# Altium PCB Interface-bottom.PcbDoc
Units mm, origin at the board's own origin, x right, y up, seen from the top; angles counter-clockwise.
Board outline 23.9 x 83.5 mm, 2 copper layers (Top Layer, Bottom Layer), stack 1.57 mm thick; 29 components, 36 nets, 131 pads, 33 vias.
Unrouted connection lines stored in the file: 27.
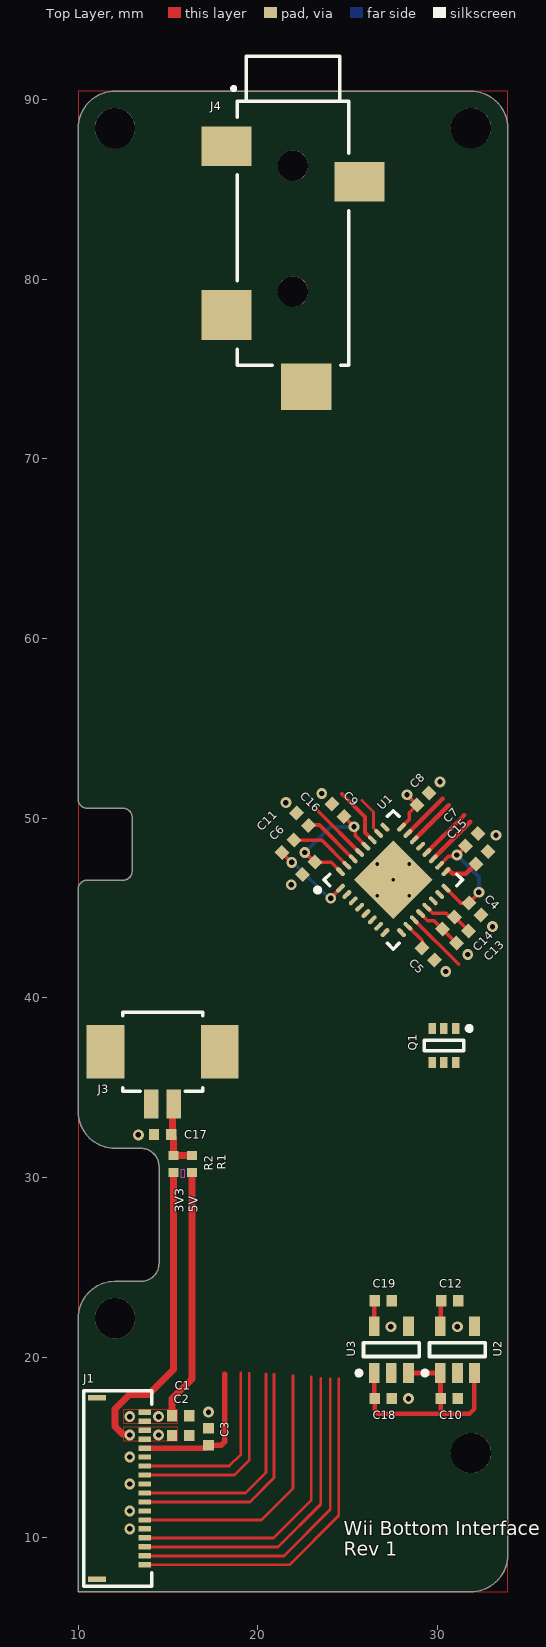
[diagram p0: Top Layer view]
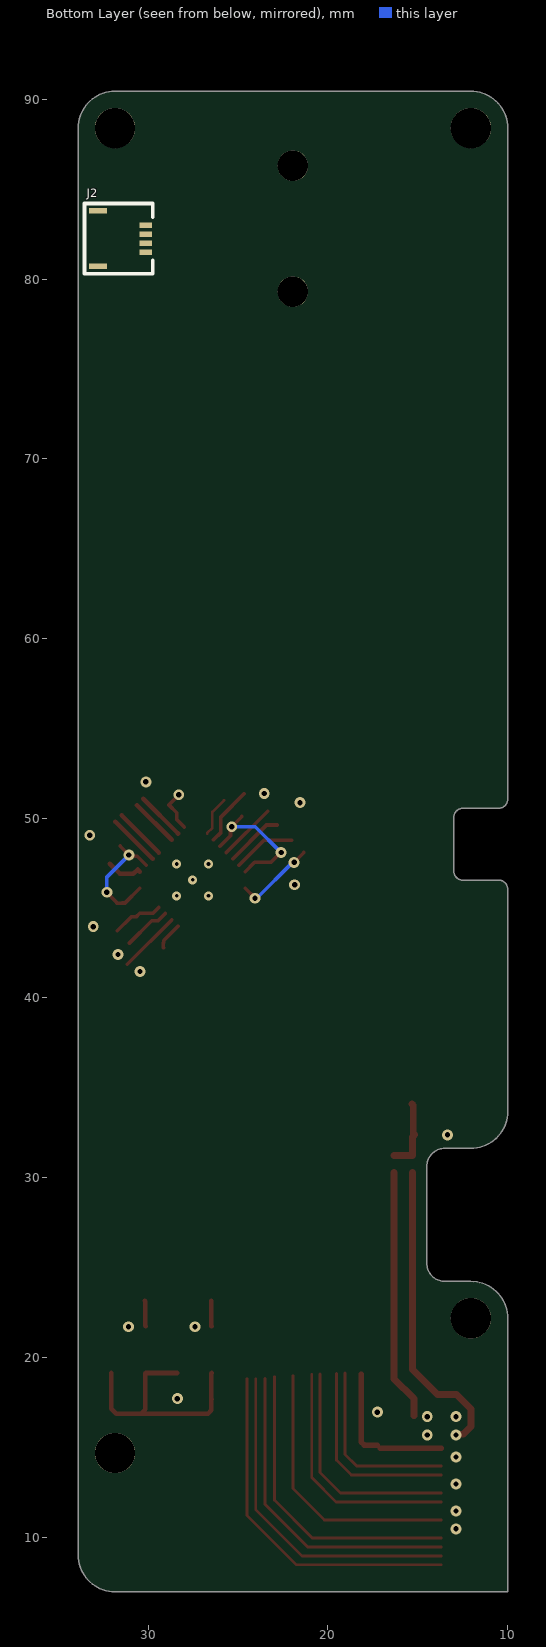
[diagram p1: Bottom Layer view, seen from below]
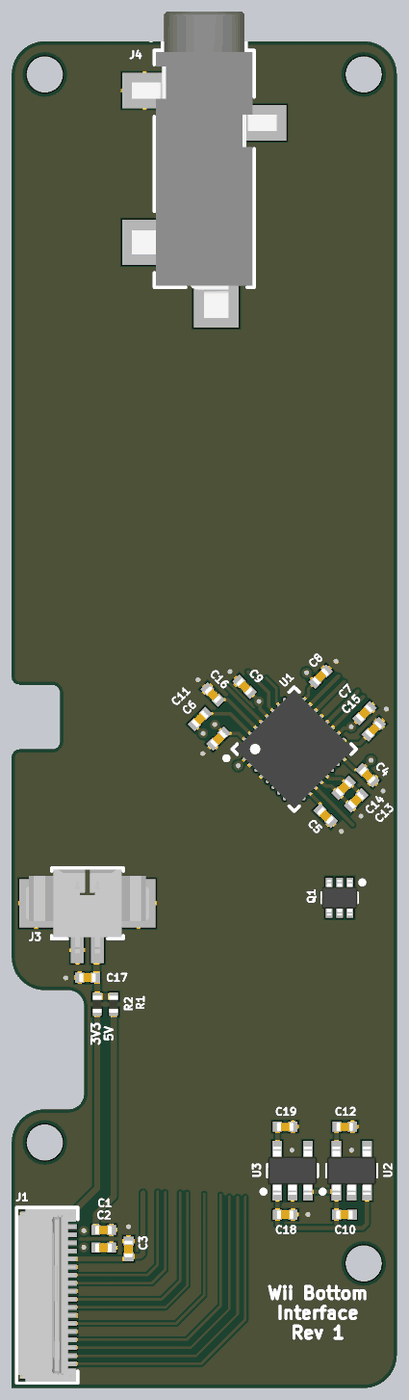
[diagram p2: 3D render of the assembled board from above, using the file's embedded part models]

## Layer stack, top to bottom
Top Solder: solder mask 0.0127, Solder Resist, Dk 3.8
Top Layer: signal copper 0.035
Dielectric: core 1.5, FR-4, Dk 4.5
Bottom Layer: signal copper 0.035
Bottom Solder: solder mask 0.0127, Solder Resist, Dk 3.8

## Board outline
10,6.95 10,22.175 cw(c12.05,22.175) 12.05,24.225 13.5,24.225 ccw(c13.5,25.225) 14.5,25.225 14.5,30.625 ccw(c13.5,30.625) 13.5,31.625 12.05,31.625 cw(c12.05,33.675) 10,33.675 10,46.05 cw(c10.5,46.05) 10.5,46.55 12.5,46.55 ccw(c12.5,47.05) 13,47.05 13,50.05 ccw(c12.5,50.05) 12.5,50.55 10.5,50.55 cw(c10.5,51.05) 10,51.05 10,88.4 cw(c12.05,88.4) 12.05,90.45 31.85,90.45 cw(c31.85,88.4) 33.9,88.4 33.9,9 cw(c31.85,9) 31.85,6.95

## Design rules (kind name [scope] priority, off if disabled: settings)
BoardOutlineClearance [All] p1: gap=0.2 ignorepadtopadclearanceinfootprint=FALSE
Clearance [All] p1: gap=0.127 ignorepadtopadclearanceinfootprint=FALSE except(0.25: Arc-Hole Track-Hole SMDPad-Hole THPad-Hole Via-Hole Fill-Hole Poly-Hole Region-Hole Text-Hole)
ComponentClearance [All] p1: gap=0.127 collisioncheckmode=3 verticalgap=0.127 showdistances=TRUE
DiffPairsRouting [All] p1: maxlimit=0.254 minlimit=0.127 mostfreqgap=0.127 toplayer_minwidth=0.127 toplayer_maxwidth=25.4 toplayer_prefwidth=0.127 bottomlayer_minwidth=0.127 bottomlayer_maxwidth=25.4 bottomlayer_prefwidth=0.127 maxuncoupledlength=12.7
Height [All] p1: minheight=0 maxheight=1816.048 prefheight=12.7
HoleSize [All] p1: absolutevalues=TRUE maxlimit=6.3 minlimit=0.3 maxpercent=80.000 minpercent=20.000
HoleToHoleClearance [All] p1: gap=0.25 allowstackedmicrovias=FALSE
MinimumAnnularRing [All] p1: minimumring=0.076
MinimumSolderMaskSliver [All] p1: minsoldermaskwidth=0
PlaneClearance [All] p1: clearance=0.127
PlaneConnect PlaneConnectPowerPads [InPadClass('PowerPads')] p1: planeconnectstyle=Direct reliefexpansion=0.508 reliefentries=4 reliefconductorwidth=0.254 reliefairgap=0.254
PlaneConnect [All] p2: pad.planeconnectstyle=Relief pad.reliefexpansion=0.3 pad.reliefentries=4 pad.reliefconductorwidth=0.127 pad.reliefairgap=0.127 via.planeconnectstyle=Direct via.reliefexpansion=0.3 via.reliefentries=4 via.reliefconductorwidth=0.127 via.reliefairgap=0.127
PolygonConnect PolygonConnectPowerPads [All vs (InPadClass('PowerPads'))] p1: connectstyle=Direct reliefconductorwidth=0.254 reliefentries=4 polygonreliefangle="90 Angle" airgapwidth=0.254
PolygonConnect [All] p2: thpad.connectstyle=Relief thpad.reliefconductorwidth=0.254 thpad.reliefentries=4 thpad.polygonreliefangle="90 Angle" thpad.airgapwidth=0.127 smdpad.connectstyle=Relief smdpad.reliefconductorwidth=0.254 smdpad.reliefentries=4 smdpad.polygonreliefangle="90 Angle" smdpad.airgapwidth=0.127 via.connectstyle=Direct via.reliefconductorwidth=0.127 via.reliefentries=4 via.polygonreliefangle="90 Angle" via.airgapwidth=0.127
RoutingVias [All] p1: holewidth=0.3 width=0.6 viastyle="Through Hole" minholewidth=0.3 minwidth=0.6 maxholewidth=0.6 maxwidth=6.6
SilkToSilkClearance [All] p1: silktosilkclearance=0
SilkToSolderMaskClearance [IsPad] p1: minsilkscreentomaskgap=0.127 clearancetoexposedcopper=TRUE
SolderMaskExpansion SolderMaskExpansion_Via [isVia] p1: expansion=0.102 istentingtop=TRUE
SolderMaskExpansion [All] p2: expansion=0.075 istentingtop=FALSE
Width [All] p1: maxlimit=25.4 minlimit=0.127 preferedwidth=0.127 minimp=50.000000 maximp=50.000000 favimp=50.000000
20 further rules are at their usual default settings.

## Components (designator, comment, footprint, x,y, rotation, side; value= is the part's Value field where it differs from the comment)
C1 "Capacitor" CAPC1005X06N 15.7,16.75 r180 top value=1uF
C2 "Capacitor" CAPC1005X06N 15.7,15.65 r180 top value=1uF
C3 "Capacitor" CAPC1005X06N 17.25,15.575 r270 top value=0.1uF
C4 "Capacitor" CAPC1005X06N 32.083,44.941 r135 top value=1uF
C5 "Capacitor" CAPC1005X06N 29.483,42.441 r135 top value=1uF
C6 "Capacitor" CAPC1005X06N 22.833,47.216 r45 top value=1uF
C7 "Capacitor" CAPC1005X06N 31.9,48.8 r225 top value=1uF
C8 "Capacitor" CAPC1005X06N 29.183,51.066 r225 top value=1uF
C9 "Capacitor" CAPC1005X06N 24.458,50.441 r315 top value=1uF
C10 "Capacitor" CAPC1005X06N 30.65,17.7 r180 top value=1uF
C11 "Capacitor" CAPC1005X06N 21.683,48.441 r225 top value=2.2uF
C12 "Capacitor" CAPC1005X06N 30.675,23.15 r180 top value=1uF
C13 "Capacitor" CAPC1005X06N 31.383,43.391 r45 top value=10uF
C14 "Capacitor" CAPC1005X06N 30.608,44.166 r45 top value=0.1uF
C15 "Capacitor" CAPC1005X06N 32.475,47.8 r225 top value=2.2uF
C16 "Capacitor" CAPC1005X06N 22.483,49.941 r315 top value=2.2uF
C17 "Capacitor" CAPC1005X06N 14.7,32.4 r0 top value=1uF
C18 "Capacitor" CAPC1005X06N 26.975,17.7 r180 top value=1uF
C19 "Capacitor" CAPC1005X06N 26.975,23.15 r180 top value=1uF
J1 "5034801800" 5034801800 12.2,12.7 r270 top
J2 "5034800400" 5034800400 31.65,82.25 r270 bottom
J3 "53261-0271" 0532610271 14.7,36.5 r180 top
J4 "SJ-3524-SMT-TR" SJ-3524-SMT-TR 21.95,82.8 r270 top
Q1 "DMN63D8LDW-7" SOT65P210X110-6N 30.35,37.35 r270 top
R1 "Resistor" RESC1005X04N 15.3,30.75 r90 top value=0
R2 "Resistor" RESC1005X04N 16.325,30.75 r90 top value=0
U1 "LM49450SQ/NOPB" QFN50P500X500X80_HS-33N 27.533,46.566 r45 top
U2 "LP5907MFX-1.8/NOPB" SOT95P280X145-5N 31.1,20.425 r90 top
U3 "LP5907MFX-2.5/NOPB" SOT95P280X145-5N 27.425,20.425 r90 top

## Footprints (in the part's own frame and the unit in brackets; to place one, negate y for a bottom-side part, rotate by r counter-clockwise, add the part's x,y. Pads: shape width x height; smd on the part's side, far side on the other; paste and mask are expansions set on the pad)
0532610271 [mm] "CONN HEADER SMD R/A 2POS 1.25MM"
  rect 0.8x1.6 smd: 1(-0.625,2.4) 2(0.625,2.4)
  rect 2.1x3 smd: SHIELD(-3.175,-0.5) SHIELD(3.175,-0.5)
  silkscreen extent -2.22,-2.7 2.22,1.7, body extent -3.83,-2.6 3.83,2.6, height 3.39
5034800400 [mm] "CONN FFC FPC 4POS 0.50MM R/A"
  rect 0.3x0.7 smd mask+0.05: 1(-0.75,1.5) 2(-0.25,1.5) 3(0.25,1.5) 4(0.75,1.5)
  rect 0.3x1 smd mask+0.05: SHIELD(-1.54,-1.15)
  rect 0.3x1 smd: SHIELD(1.54,-1.15)
  silkscreen extent -1.95,-1.9 1.95,1.9, body extent -1.85,-1.8 1.85,1.8, height 1.88
5034801800 [mm] "CONN FFC FPC 18POS 0.50MM R/A"
  rect 0.3x0.7 smd mask+0.05: 1(-4.25,1.5) 2(-3.75,1.5) 3(-3.25,1.5) 4(-2.75,1.5) 5(-2.25,1.5) 6(-1.75,1.5) 7(-1.25,1.5) 8(-0.75,1.5) 9(-0.25,1.5) 10(0.25,1.5) 11(0.75,1.5) 12(1.25,1.5) 13(1.75,1.5) 14(2.25,1.5) 15(2.75,1.5) 16(3.25,1.5) 17(3.75,1.5) 18(4.25,1.5)
  rect 0.3x1 smd mask+0.05: SHIELD(-5.04,-1.15) SHIELD(5.04,-1.15)
  silkscreen extent -5.45,-1.9 5.45,1.9, body extent -5.35,-1.8 5.35,1.8, height 1.88
CAPC1005X06N [mm] "Chip Capacitor, 2-Leads, Body 1.00x0.50mm, IPC Medium Density"
  rect 0.58x0.62 smd: 1(-0.48,0) 2(0.48,0)
  body extent -0.52,-0.27 0.53,0.28, height 0.55
QFN50P500X500X80_HS-33N [mm] "QFN, 32-Leads, Body 5.00x5.00mm, Pitch 0.50mm, Thermal Pad 3.10x3.10mm, IPC Medium Density"
  oval 0.6x0.24 smd: 1(-2.4,1.75) 2(-2.4,1.25) 3(-2.4,0.75) 4(-2.4,0.25) 5(-2.4,-0.25) 6(-2.4,-0.75) 7(-2.4,-1.25) 8(-2.4,-1.75) 17(2.4,-1.75) 18(2.4,-1.25) 19(2.4,-0.75) 20(2.4,-0.25) 21(2.4,0.25) 22(2.4,0.75) 23(2.4,1.25) 24(2.4,1.75)
  oval 0.24x0.6 smd: 9(-1.75,-2.4) 10(-1.25,-2.4) 11(-0.75,-2.4) 12(-0.25,-2.4) 13(0.25,-2.4) 14(0.75,-2.4) 15(1.25,-2.4) 16(1.75,-2.4) 25(1.75,2.4) 26(1.25,2.4) 27(0.75,2.4) 28(0.25,2.4) 29(-0.25,2.4) 30(-0.75,2.4) 31(-1.25,2.4) 32(-1.75,2.4)
  rect 3.1x3.1 smd: 33(0,0)
  silkscreen extent -3.5,-2.73 2.73,2.73, body extent -2.58,-2.58 2.58,2.58, height 0.8
RESC1005X04N [mm] "Chip Resistor, 2-Leads, Body 1.00x0.50mm, IPC Medium Density"
  rect 0.5x0.55 smd: 1(-0.475,0) 2(0.475,0)
  body extent -0.52,-0.27 0.53,0.28, height 0.4
SJ-3524-SMT-TR [mm] "CONN JACK STEREO 3.5MM SMD R/A"
  rect 2.2x2.8 smd: 1(-4.6,-3.7) 3(-2.6,3.7)
  rect 2.8x2.8 smd: 2(4.8,-3.7)
  rect 2.6x2.8 smd: 4(8.8,0.75)
  round 1.7 hole 1.7 unplated: ""(-3.5,0) ""(3.5,0)
  silkscreen extent -9.6,-3.4 7.6,3.1, body extent -9.5,-4.5 9.5,4.5, height 5.09
SOT65P210X110-6N [mm] "SOT23, 6-Leads, Body 2.00x2.10mm, Pitch 0.65mm, IPC Medium Density"
  rect 0.6x0.42 smd: 1(-0.95,0.65) 2(-0.95,0) 3(-0.95,-0.65) 4(0.95,-0.65) 5(0.95,0) 6(0.95,0.65)
  silkscreen extent -1.07,-1.1 0.3,1.54, body extent -1.1,-1.1 1.1,1.1, height 1.1
SOT95P280X145-5N [mm] "SOT23, 5-Leads, Body 2.90x2.80mm, Pitch 0.95mm, IPC Medium Density"
  rect 1.1x0.6 smd: 1(-1.3,0.95) 2(-1.3,0) 3(-1.3,-0.95) 4(1.3,-0.95) 5(1.3,0.95)
  silkscreen extent -1.42,-1.55 0.38,1.92, body extent -1.5,-1.52 1.5,1.53, height 1.45

## Part data
C1 C2 C3 C4 C5 C6 C7 C8 C9 C10 C11 C12 C14 C15 C16 C17 C18 C19: "General purpose capacitor", Package=0402, Rated Voltage=25V
C13: "General purpose capacitor", Package=0402, Rated Voltage=10V
J1: "CONN FFC FPC 18POS 0.50MM R/A", Current Rating=500mA, Flammability Rating="UL94 V-0", Housing Color=White, Manufacturer=Molex, Max Operating Temperature=85°C, Max Voltage Rating (AC)=50V, Min Operating Temperature=-40°C, Package Quantity=3000, Actuator Material=Nylon,Glass,Polyamide, Category="FFC / FPC", ComponentLink1Description=https://datasheet.ciiva.com/671/5034800400-sd-671136.pdf?src-supplier=Digi-Key, ComponentLink1URL=https://datasheet.ciiva.com/671/5034800400-sd-671136.pdf?src-supplier=Digi-Key, ComponentLink2Description=https://datasheet.ciiva.com/5137/5034801800-ffc-fpc-connectors-179548-5137672.pdf?src-supplier=Mouser, ComponentLink2URL=https://datasheet.ciiva.com/5137/5034801800-ffc-fpc-connectors-179548-5137672.pdf?src-supplier=Mouser, ComponentLink3Description=https://datasheet.ciiva.com/10366/5034801800-ffc-fpc-connectors-10366583.pdf?src-supplier=Avnet, ComponentLink3URL=https://datasheet.ciiva.com/10366/5034801800-ffc-fpc-connectors-10366583.pdf?src-supplier=Avnet, Contact Location=Dual, Contact Material=Bronze,Gold, Contact Plating=Gold,Tin, Depth=4mm, ELV=Compliant, Gender=Receptacle, Halogen Free="Low Halogen", Housing Material=Polymer, Length=10.7mm, Manufacturer Part Number=5034801800, Material=Bronze, Mating Cycles=10, Number of Circuits=18, Number of Contacts=18, Number of Positions=18, Number of Rows=1, Orientation="Right Angle", Packaging="Tape and Reel", Pitch=0.5mm, Pricing 1="1=1.44000, 10=1.31000, 25=1.23000, 50=1.17660, 100=1.12310, 250=1.01616, 500=0.93594, 1000=0.80223 (USD)", Radiation Hardening=No, REACH SVHC=Unknown, RoHS=Yes, Stackable=No, Stock 1=15433, Supplier 1=Digi-Key, Termination=SMD/SMT, Voltage Rating=50V, Voltage Rating (AC)=50V, Wire/Cable Type=Straight
J2: "CONN FFC FPC 4POS 0.50MM R/A", Current Rating=500mA, Flammability Rating="UL94 V-0", Housing Color=White, Manufacturer=Molex, Max Operating Temperature=85°C, Max Voltage Rating (AC)=50V, Min Operating Temperature=-40°C, Package Quantity=1, Actuator Material=Nylon,Glass,Polyamide, Category="FFC / FPC", ComponentLink1Description=https://datasheet.ciiva.com/671/5034800400-sd-671136.pdf?src-supplier=Digi-Key, ComponentLink1URL=https://datasheet.ciiva.com/671/5034800400-sd-671136.pdf?src-supplier=Digi-Key, ComponentLink2Description=https://datasheet.ciiva.com/15249/392825034800400-ffc-fpc-nectors-15249120.pdf?src-supplier=Arrow+Europe, ComponentLink2URL=https://datasheet.ciiva.com/15249/392825034800400-ffc-fpc-nectors-15249120.pdf?src-supplier=Arrow+Europe, ComponentLink3Description=https://datasheet.ciiva.com/16658/5034800400-ffc-fpc-connectors-16658883.pdf?src-supplier=Avnet+Europe, ComponentLink3URL=https://datasheet.ciiva.com/16658/5034800400-ffc-fpc-connectors-16658883.pdf?src-supplier=Avnet+Europe, ComponentLink4Description=https://datasheet.ciiva.com/3926/135095034800400-ffc-fpc-nectors-3926214.pdf?src-supplier=Arrow, ComponentLink4URL=https://datasheet.ciiva.com/3926/135095034800400-ffc-fpc-nectors-3926214.pdf?src-supplier=Arrow, ComponentLink5Description=https://datasheet.ciiva.com/5137/5034800400-ffc-fpc-connectors-179546-5137607.pdf?src-supplier=Mouser, ComponentLink5URL=https://datasheet.ciiva.com/5137/5034800400-ffc-fpc-connectors-179546-5137607.pdf?src-supplier=Mouser, ComponentLink6Description=https://datasheet.ciiva.com/671/5034800400-sd-671137.pdf?src-supplier=Digi-Key, ComponentLink6URL=https://datasheet.ciiva.com/671/5034800400-sd-671137.pdf?src-supplier=Digi-Key, ComponentLink7Description=https://datasheet.ciiva.com/671/5034800400-sd-671138.pdf?src-supplier=Digi-Key, ComponentLink7URL=https://datasheet.ciiva.com/671/5034800400-sd-671138.pdf?src-supplier=Digi-Key, ComponentLink8Description=https://datasheet.ciiva.com/10366/5034800400-ffc-fpc-connectors-10366566.pdf?src-supplier=Avnet, ComponentLink8URL=https://datasheet.ciiva.com/10366/5034800400-ffc-fpc-connectors-10366566.pdf?src-supplier=Avnet, Contact Material=Bronze, Contact Plating=Gold, Depth=4mm, ELV=Compliant, Gender=Female, Halogen Free="Low Halogen", Housing Material=Polymer, Length=3.7mm, Manufacturer Part Number=5034800400, Material=Bronze, Mating Cycles=10, Max Voltage Rating (DC)=50V, Number of Circuits=4, Number of Contacts=4, Number of Positions=4, Number of Rows=1, Orientation="Right Angle", Packaging="Tape and Reel", Pitch=0.5mm, Pricing 1="1=0.70000, 10=0.65200, 25=0.58640, 50=0.52140, 100=0.49970, 250=0.45624, 500=0.43450, 1000=0.35846 (USD)", Radiation Hardening=No, REACH SVHC="No SVHC", RoHS=Yes, Stackable=No, Stock 1=13432, Supplier 1=Digi-Key, Termination=Solder, Voltage Rating=50V, Voltage Rating (AC)=50V, Wire/Cable Type=Straight
J3: "MOLEX - 53261-0271 - CONNECTOR, HEADER, 2POS, 1ROW, 1.25MM", Color=Beige, Contact Resistance=20mR, Current Rating=1A, Flammability Rating="UL94 V-0", Insulation Resistance=100MR, Manufacturer=Molex, Max Operating Temperature=85°C, Min Operating Temperature=-40°C, Package Quantity=1000, Voltage Rating=125V, Category="Headers and Wire Housings", ComponentLink1Description=https://datasheet.ciiva.com/11747/0900766b8078fc90-11747475.pdf?src-supplier=RSComponents, ComponentLink1URL=https://datasheet.ciiva.com/11747/0900766b8078fc90-11747475.pdf?src-supplier=RSComponents, ComponentLink2Description=https://datasheet.ciiva.com/7167/1626147-7167496.pdf?src-supplier=Newark, ComponentLink2URL=https://datasheet.ciiva.com/7167/1626147-7167496.pdf?src-supplier=Newark, ComponentLink3Description=https://datasheet.ciiva.com/30193/198270532610271-pcb-headers-30193321.pdf?src-supplier=Onlinecomponents.com, ComponentLink3URL=https://datasheet.ciiva.com/30193/198270532610271-pcb-headers-30193321.pdf?src-supplier=Onlinecomponents.com, ComponentLink4Description=https://datasheet.ciiva.com/5151/0532610271-pcb-headers-171053-5151611.pdf?src-supplier=Mouser, ComponentLink4URL=https://datasheet.ciiva.com/5151/0532610271-pcb-headers-171053-5151611.pdf?src-supplier=Mouser, ComponentLink5Description=https://datasheet.ciiva.com/34303/1932547-34303342.pdf?src-supplier=Jameco, ComponentLink5URL=https://datasheet.ciiva.com/34303/1932547-34303342.pdf?src-supplier=Jameco, ComponentLink6Description=https://datasheet.ciiva.com/16658/0532610271-pcb-headers-16658423.pdf?src-supplier=Avnet+Europe, ComponentLink6URL=https://datasheet.ciiva.com/16658/0532610271-pcb-headers-16658423.pdf?src-supplier=Avnet+Europe, ComponentLink7Description=https://datasheet.ciiva.com/17035/70091115-17035863.pdf?src-supplier=Allied+Electronics, ComponentLink7URL=https://datasheet.ciiva.com/17035/70091115-17035863.pdf?src-supplier=Allied+Electronics, ComponentLink8Description=https://datasheet.ciiva.com/7920/1887027-7920826.pdf?src-supplier=Element14, ComponentLink8URL=https://datasheet.ciiva.com/7920/1887027-7920826.pdf?src-supplier=Element14, ComponentLink9Description=https://datasheet.ciiva.com/9468/0532610271-pcb-headers-9468506.pdf?src-supplier=Avnet, ComponentLink9URL=https://datasheet.ciiva.com/9468/0532610271-pcb-headers-9468506.pdf?src-supplier=Avnet, ComponentLink10Description=https://datasheet.ciiva.com/22683/1626147-22683562.pdf?src-supplier=Element14, ComponentLink10URL=https://datasheet.ciiva.com/22683/1626147-22683562.pdf?src-supplier=Element14, ComponentLink11Description=https://datasheet.ciiva.com/46393/1808526-46393547.pdf?src-supplier=Element14, ComponentLink11URL=https://datasheet.ciiva.com/46393/1808526-46393547.pdf?src-supplier=Element14, Contact Material=Bronze,Tin, Contact Plating=Tin, Gender=Male, Glow Wire Compliant=Non-compliant, Housing Material=Thermoplastic, Lead Free="Lead Free", Lead Pitch=1.25mm, Manufacturer Part Number=53261-0271, Mount="Surface Mount", Number of Circuits=2, Number of Contacts=2, Number of Positions=2, Number of Rows=1, Orientation="Right Angle", Packaging="Tape and Reel", Pitch=1.25mm, Pricing 1="1=0.51000, 10=0.48200, 100=0.36940, 500=0.32120 (USD)", Radiation Hardening=No, REACH SVHC=Unknown, RoHS=Yes, Stock 1=27056, Supplier 1=Digi-Key, Termination=SMD/SMT, Voltage Rating (AC)=125V, Voltage Rating (DC)=125V, Working Voltage=125V
J4: "Conn 3.5MM Audio Jack F 4 POS Solder RA SMD 3 Terminal 1 Port T/R", Case/Package=SMD/SMT, Color=Black, Current Rating=1A, Manufacturer=CUI, Category=Connectors, ComponentLink1Description=https://datasheet.ciiva.com/7356/sj-352x-smt-series-7356584.pdf?src-supplier=Digi-Key, ComponentLink1URL=https://datasheet.ciiva.com/7356/sj-352x-smt-series-7356584.pdf?src-supplier=Digi-Key, ComponentLink2Description=https://datasheet.ciiva.com/16486/sj-352x-smt-series-16486874.pdf?src-supplier=Future+Electronics, ComponentLink2URL=https://datasheet.ciiva.com/16486/sj-352x-smt-series-16486874.pdf?src-supplier=Future+Electronics, Connector Type=Jack, Contact Plating=Silver, Gender=Female, Lead Free="Lead Free", Manufacturer Part Number=SJ-3524-SMT-TR, Mount="Surface Mount", Number of Conductors=3, Number of Ports=1, Orientation=Horizontal, Packaging="Tape and Reel", Pricing 1="1=1.04000, 10=0.91700, 25=0.86320, 50=0.82740, 100=0.79130, 250=0.71940, 500=0.64746 (USD)", RoHS=Yes, Shielding=Unshielded, Stock 1=138416, Supplier 1=Digi-Key, Termination=Solder
Q1: "DIODES INC. - DMN63D8LDW-7 - Dual MOSFET, N Channel, 30 V, 260 mA, 2.8 ohm, SOT-363, Surface Mount", Case/Package=SOT-363, Continuous Drain Current (ID)=260mA, Drain to Source Breakdown Voltage=30V, Drain to Source Resistance=2.8R, Gate to Source Voltage (Vgs)=20V, Input Capacitance=22pF, Manufacturer=Diodes, Max Operating Temperature=150°C, Max Power Dissipation=300mW, Min Operating Temperature=-55°C, Package Quantity=3000, Power Dissipation=400mW, Threshold Voltage=1.5V, Category=MOSFETs, ComponentLink1Description=https://datasheet.ciiva.com/30023/dmn63d8ldw-30023824.pdf?src-supplier=Avnet, ComponentLink1URL=https://datasheet.ciiva.com/30023/dmn63d8ldw-30023824.pdf?src-supplier=Avnet, ComponentLink2Description=https://datasheet.ciiva.com/6384/dmn63d8ldw-6384534.pdf?src-supplier=Digi-Key, ComponentLink2URL=https://datasheet.ciiva.com/6384/dmn63d8ldw-6384534.pdf?src-supplier=Digi-Key, Contact Plating=Tin,Matte, Drain to Source Voltage (Vdss)=30V, Element Configuration=Dual, Fall Time=6.3ns, FET Type="2 N-Channel", Height=1mm, Lead Free="Lead Free", Length=2.2mm, Manufacturer Part Number=DMN63D8LDW-7, Mount="Surface Mount", Number of Channels=2, Number of Elements=2, Number of Pins=6, Packaging="Tape and Reel", Pricing 1="1=0.30000, 10=0.24300, 25=0.20360, 100=0.09950, 250=0.09796, 500=0.08302, 1000=0.05768 (USD)", Radiation Hardening=No, Rds On Max=2.8R, REACH SVHC="No SVHC", Rise Time=3.2ns, RoHS=Yes, Stock 1=67979, Supplier 1=Digi-Key, Turn-Off Delay Time=12ns, Turn-On Delay Time=3.3ns, Weight=0.000212oz, Width=1.35mm
R1 R2: "General purpose resistor", Package=0402
  R2: Note="NO STUFF"
U1: "IC, AUDIO SUBSYSTEM D 32-LLP", Dual Supply Voltage=5V, Manufacturer="TI National Semiconductor", Max Operating Temperature=85°C, Max Output Power=2.5W, Max Supply Voltage=5.5V, Min Operating Temperature=-40°C, Min Supply Voltage=1.8V, Nominal Supply Current=18mA, Package Quantity=1000, Power Consumption=57.6mW, Power Supply Rejection Ratio (PSRR)=70dB, Voltage Gain=53.8dB, Category="Amplifiers - Audio", ComponentLink1Description=https://datasheet.ciiva.com/1482/90149-1482432.pdf?src-supplier=Element14, ComponentLink1URL=https://datasheet.ciiva.com/1482/90149-1482432.pdf?src-supplier=Element14, ComponentLink2Description=https://datasheet.ciiva.com/1489/1777553-1489572.pdf?src-supplier=Farnell, ComponentLink2URL=https://datasheet.ciiva.com/1489/1777553-1489572.pdf?src-supplier=Farnell, ComponentLink3Description=https://datasheet.ciiva.com/6631/lm49450-6631304.pdf?src-supplier=Digi-Key, ComponentLink3URL=https://datasheet.ciiva.com/6631/lm49450-6631304.pdf?src-supplier=Digi-Key, ComponentLink4Description=https://datasheet.ciiva.com/6631/lm49450-6631306.pdf?src-supplier=Digi-Key, ComponentLink4URL=https://datasheet.ciiva.com/6631/lm49450-6631306.pdf?src-supplier=Digi-Key, ComponentLink5Description=https://datasheet.ciiva.com/6631/lm49450-6631308.pdf?src-supplier=Digi-Key, ComponentLink5URL=https://datasheet.ciiva.com/6631/lm49450-6631308.pdf?src-supplier=Digi-Key, Contact Plating=Tin, Features=I²C, Height=0.8mm, Lead Free="Lead Free", Length=5mm, Load Impedance=8R, Manufacturer Part Number=LM49450SQ/NOPB, Mount="Surface Mount", Number of Analog Inputs=2, Number of Analog Outputs=4, Number of Channels=2, Number of DAC Channels=2, Number of Pins=32, Output Power=2.5W, Packaging="Tape and Reel", Pricing 1="1=5.36000, 10=4.81700, 25=4.55400, 100=3.74440, 250=3.35984, 500=3.23840 (USD)", Radiation Hardening=No, REACH SVHC="No SVHC", RoHS=Yes, Stock 1=899, Supplier 1=Digi-Key, Supply Type=Hex, Termination=SMD/SMT, Width=5mm
U2: "IC REG LINEAR 1.8V 250MA SOT23-5", Case/Package=SOT-23, Dropout Voltage=250mV, Manufacturer="Texas Instruments", Max Input Voltage=5.5V, Max Operating Temperature=125°C, Max Output Current=250mA, Min Input Voltage=2.2V, Min Operating Temperature=-40°C, Nominal Output Voltage=1.8V, Output Voltage Accuracy=2%, Package Quantity=3000, Power Supply Rejection Ratio (PSRR)=82dB, Quiescent Current=25uA, Accuracy=2%, Category="Voltage Regulators - Linear", ComponentLink1Description=https://datasheet.ciiva.com/15083/lp5907-15083594.pdf?src-supplier=Digi-Key, ComponentLink1URL=https://datasheet.ciiva.com/15083/lp5907-15083594.pdf?src-supplier=Digi-Key, Contact Plating=Tin, Lead Free="Lead Free", Manufacturer Part Number=LP5907MFX-1.8/NOPB, Mount="Surface Mount", Number of Outputs=1, Number of Pins=5, Number of Regulators=1, Output Current=250mA, Output Type=Fixed, Output Voltage=1.8V, Packaging="Tape and Reel", Polarity=Positive, Pricing 1="1=0.54000, 10=0.46100, 25=0.43040, 100=0.31980, 250=0.27060, 500=0.25830, 1000=0.19065 (USD)", REACH SVHC="No SVHC", RoHS=Yes, Stock 1=191037, Supplier 1=Digi-Key
U3: "IC REG LINEAR 2.5V 250MA SOT23-5", Case/Package=SOT-23, Dropout Voltage=50mV, Manufacturer="Texas Instruments", Max Input Voltage=5.5V, Max Operating Temperature=125°C, Max Output Current=250mA, Min Input Voltage=2.2V, Min Operating Temperature=-40°C, Output Voltage=2.5V, Quiescent Current=25uA, Accuracy=2%, Category="Voltage Regulators - Linear", ComponentLink1Description=https://datasheet.ciiva.com/48505/lp5907-48505033.pdf?src-supplier=Avnet, ComponentLink1URL=https://datasheet.ciiva.com/48505/lp5907-48505033.pdf?src-supplier=Avnet, Lead Free="Lead Free", Manufacturer Part Number=LP5907MFX-2.5/NOPB, Mount="Surface Mount", Number of Outputs=1, Number of Pins=5, Number of Regulators=1, Output Current=250mA, Output Type=Fixed, Packaging="Tape and Reel", Polarity=Positive, Pricing 1="1=0.54000, 10=0.46100, 25=0.43040, 100=0.31980, 250=0.27060, 500=0.25830, 1000=0.19065 (USD)", Radiation Hardening=No, RoHS=Yes, Stock 1=29463, Supplier 1=Digi-Key

## Free pads (board coordinates)
  round 2.25 hole 2.25 unplated: ""(12.05,22.175) ""(12.05,88.4) ""(31.85,14.675) ""(31.85,88.4)

## Via types
v1: diameter 0.6, hole 0.3, Top Layer to Bottom Layer, tented both sides, 28 vias
v2: diameter 0.5, hole 0.2, Top Layer to Bottom Layer, tented bottom, 5 vias

## Nets (pads, with @x,y where several pads share a name; then routed paths per layer and width w, separated by ;. In a path a pad name is that pad's centre, name@x,y a point inside that pad or via, vN(x,y) a via of type N, cw(c..) or ccw(c..) an arc to the next point about the centre after c; other vN are vias at no path point)
1V8: C12.2 Q1.2 Q1.5 U1.11 U2.5 | length 4.9
  Top Layer w0.203: U1.11 31.172,41.866
  Top Layer w0.254: U2.5 30.172,21.747 30.172,23.128 C12.2
2V5: C6.2 C9.2 C19.2 U1.28 U1.32 U3.5 | length 9.4
  Top Layer w0.203: v1(22.608,48.091) 22.622,48.091 23.158,47.555 C6.2 23.187,47.541 24.083,47.541 U1.32 ; C9.2 24.797,50.078 v1(25.35,49.525) 25.426,49.449 25.426,49.027 U1.28
  Top Layer w0.254: U3.5 26.485,21.735 26.485,23.14 C19.2
  Bottom Layer w0.203: v1(22.608,48.091) 24.042,49.525 v1(25.35,49.525)
3V3: C2.2 C4.2 C5.2 C7.2 C8.2 C10.2 C18.2 J1.3 J1.4 R1.1 U1.10 U1.16 U1.18 U1.24 U2.1 U2.3 U3.1 U3.3 | length 42
  Top Layer w0.203: U1.24 27.993,49.504 28.419,49.93 28.419,50.301 C8.2 28.844,50.741 28.3,51.285 v1(28.3,51.3) ; U1.10 29.144,43.187 29.144,43.075 29.158,43.061 29.158,42.794 C5.2 ; U1.18 30.609,47.874 30.999,47.874 v1(31.075,47.95) 31.561,48.436 C7.2 ; U1.16 31.293,45.28 31.449,45.28 31.463,45.266 31.729,45.266 C4.2 31.744,45.299 32.3,45.856 v1(32.3,45.875)
  Top Layer w0.254: C18.2@26.467,17.672 C18.2 ; U3.1 26.485,19.115 26.485,17.71 C18.2 ; U3.3 U2.1 30.16,19.115 30.16,17.71 C10.2 30.17,17.099 30.4,16.869 ; U2.3 32.05,17.144 31.775,16.869 30.4,16.869 ; C18.2 26.495,17.049 26.675,16.869 30.4,16.869
  Top Layer w0.381: v1(12.875,15.675) 12.833,15.717 12.483,15.717 12.3,15.9 12.05,16.15 12.05,17.125 12.856,17.931 13.906,17.931 15.3,19.325 R1.1
  Bottom Layer w0.203: v1(31.075,47.95) 32.3,46.725 v1(32.3,45.875)
  other v1: 14.475,15.675
3V3_AO: C3.2 J1.5 | length 8.1
  Top Layer w0.305: J1.5 C3.2@17.085,14.95 ; C3.2 17.272,15.117 17.971,15.117 18.15,15.296 18.15,19.05
5V0: C1.2 J1.1 J1.2 R2.1 | length 14
  Top Layer w0.381: C1.2 15.22,17.695 16.325,18.8 R2.1
  other v1: 12.875,16.7 14.475,16.7
BYPASS: C15.2 U1.17 | length 2
  Top Layer w0.254: U1.17 30.585,47.143 30.595,47.143 30.838,46.9 31.575,46.9 C15.2
GND: C1.1 C2.1 C3.1 C4.1 C5.1 C6.1 C7.1 C8.1 C9.1 C10.1 C12.1 C13.1 C14.1 C15.1 C16.1 C17.1 C18.1 C19.1 J1.6 J1.9 J1.12 J1.14 J1.SHIELD J2.1 J2.SHIELD J3.2 J3.SHIELD J4.1 U1.2 U1.4 U1.12 U1.21 U1.25 U1.33 U2.2 U3.2 | length 2.7
  Top Layer w0.203: U1.12 29.454,44.291 29.804,44.291 C13.1
  other v1: 12.875,10.45 12.875,11.45 12.875,12.95 12.875,14.45 17.25,16.95 28.38,17.704 27.4,21.7 31.1,21.7 13.35,32.375 30.458,41.466 31.683,42.416 33.058,43.966 21.858,46.291 33.25,49.05 21.558,50.866 23.55,51.375 30.133,52.016
  other v2: 26.649,45.682 28.417,45.682 27.533,46.566 26.649,47.45 28.417,47.45
HPL: J4.2 U1.29 | length 3.3
  Top Layer w0.203: 23.358,50.387 U1.29
HPR: J4.3 U1.27 | length 3.3
  Top Layer w0.203: 24.658,51.366 25.958,50.066 25.958,49.201 U1.27
HPS: J4.4 U1.26 | length 2.2
  Top Layer w0.152: 25.783,50.991 26.433,50.341 26.433,49.457 26.72,49.17 U1.26
L: J1.17 | length 18.7
  Top Layer w0.152: J1.17 21.45,8.95 24.025,11.525 24.025,18.8
LA: J1.18 | length 19.5
  Top Layer w0.152: J1.18 21.75,8.45 24.5,11.2 24.5,18.8
LED_DATA: J1.13 | length 15.2
  Top Layer w0.152: J1.13 20.2,10.95 21.95,12.7 21.95,18.975
MCLK: U1.8
NetC11_1: C11.1 U1.31 | length 3.5
  Top Layer w0.203: C11.1 22.037,48.766 23.565,48.766 U1.31
NetC11_2: C11.2 U1.1 | length 4.6
  Top Layer w0.203: C11.2 21.344,48.078 v1(21.883,47.539) ; v1(24.058,45.541) 24.058,45.556 24.599,46.096 U1.1
  Bottom Layer w0.203: v1(21.883,47.539) 21.971,47.539 23.97,45.541 v1(24.058,45.541)
NetC16_2: C16.2 U1.30 | length 3.3
  Top Layer w0.203: C16.2 22.837,49.616 23.423,49.616 U1.30
OUTL_N: U1.20 | length 2.9
  Top Layer w0.254: U1.20 31.471,50.15
OUTL_P: U1.19 | length 2.9
  Top Layer w0.254: U1.19 31.825,49.797
OUTR_N: U1.22 | length 2.7
  Top Layer w0.254: U1.22 28.7,48.8 30.625,50.725
OUTR_P: U1.23 | length 2.7
  Top Layer w0.254: U1.23 30.274,51.075
R: J2.3
RA: J2.2
REF: C13.2 C14.2 U1.13 | length 2.9
  Top Layer w0.203: U1.13 29.737,44.716 30.47,44.716 30.681,44.505 C14.2 C13.2
SCK: U1.7
SDI: U1.6
SYS_SCL: J1.10 Q1.6 | length 12.7
  Top Layer w0.152: J1.10 19.3,12.45 20.45,13.6 20.45,19.075
SYS_SCL_1V8: Q1.1 U1.9
SYS_SDA: J1.11 Q1.3 | length 13.5
  Top Layer w0.152: J1.11 19.55,11.95 20.9,13.3 20.9,19.05
SYS_SDA_1V8: Q1.4 U1.3
VDD_FAN: C17.2 J3.1 R1.2 R2.2 | length 4
  Top Layer w0.381: J3.1 15.253,34.028 15.253,32.473 C17.2 15.18,32.38 15.3,32.26 R1.2 R2.2
VOL_DOWN_N: J1.15 | length 17
  Top Layer w0.152: J1.15 20.875,9.95 22.975,12.05 22.975,18.925
VOL_UP_N: J1.16 | length 17.8
  Top Layer w0.152: J1.16 21.125,9.45 23.5,11.825 23.5,18.825
WII_SCL_1V8: J1.7 | length 10.1
  Top Layer w0.152: J1.7 18.4,13.95 19.05,14.6 19.05,19.125
WII_SDA_1V8: J1.8 | length 11
  Top Layer w0.152: J1.8 18.7,13.45 19.525,14.275 19.525,19.1
WS: U1.5
pads on no net: J2.4 J4. U1.14 U1.15 U2.4 U3.4

## Polygon pours and split planes (outlines as drawn)
3V3 on Top Layer "3V3_L-01_P-001" (solid, pour order 6): 12.55,16.14 15.51,16.14 15.51,15.34 12.55,15.34
5V0 on Top Layer "5V0_L-01_P-001" (solid, pour order 5): 12.55,17.1 15.51,17.1 15.51,16.3 12.55,16.3
GND on Top Layer "GND_L-01_P-001" (solid, remove dead copper, shelved, pour order 0): 10,6.95 33.9,6.95 33.9,90.45 10,90.45
no net on Top Layer "5V0_L-01_P-001" (solid, pour order 3): 13.35,16.3
5V0 on Top Layer "5V0_L-01_P-001" (solid, pour order 2): 14.05,16.3

## Keep-outs
Top Layer:
  region: 15.702,30.45 15.702,30.025 15.923,30.025 15.923,30.45

## Silkscreen, mask and mechanical layers (free items; w line width, h text height)
Top Overlay:
  text "3V3 / 5V" at 16.65,28.038 h0.51 r90
  text "Wii Bottom Interface / Rev 1" at 24.768,8.95 h0.76
Mechanical 1:
  the board outline again, w0.1
Dimensions:
  circle w0.1: c10.95,28 r1
  lines w0.1: 7.55,24.675 7.55,31.175 14.05,31.175 14.05,24.675 7.55,24.675